# Altium PCB waffling60-MXHS.PcbDoc (part 3 of 3)
Units mm, origin at the board's own origin, x right, y up, seen from the top; angles counter-clockwise.
Board outline 284.81 x 94.3 mm, 2 copper layers (Component Side, Bottom Layer), stack 1.571 mm thick; 157 components, 101 nets, 956 pads, 124 vias.
Unrouted connection lines stored in the file: 1.
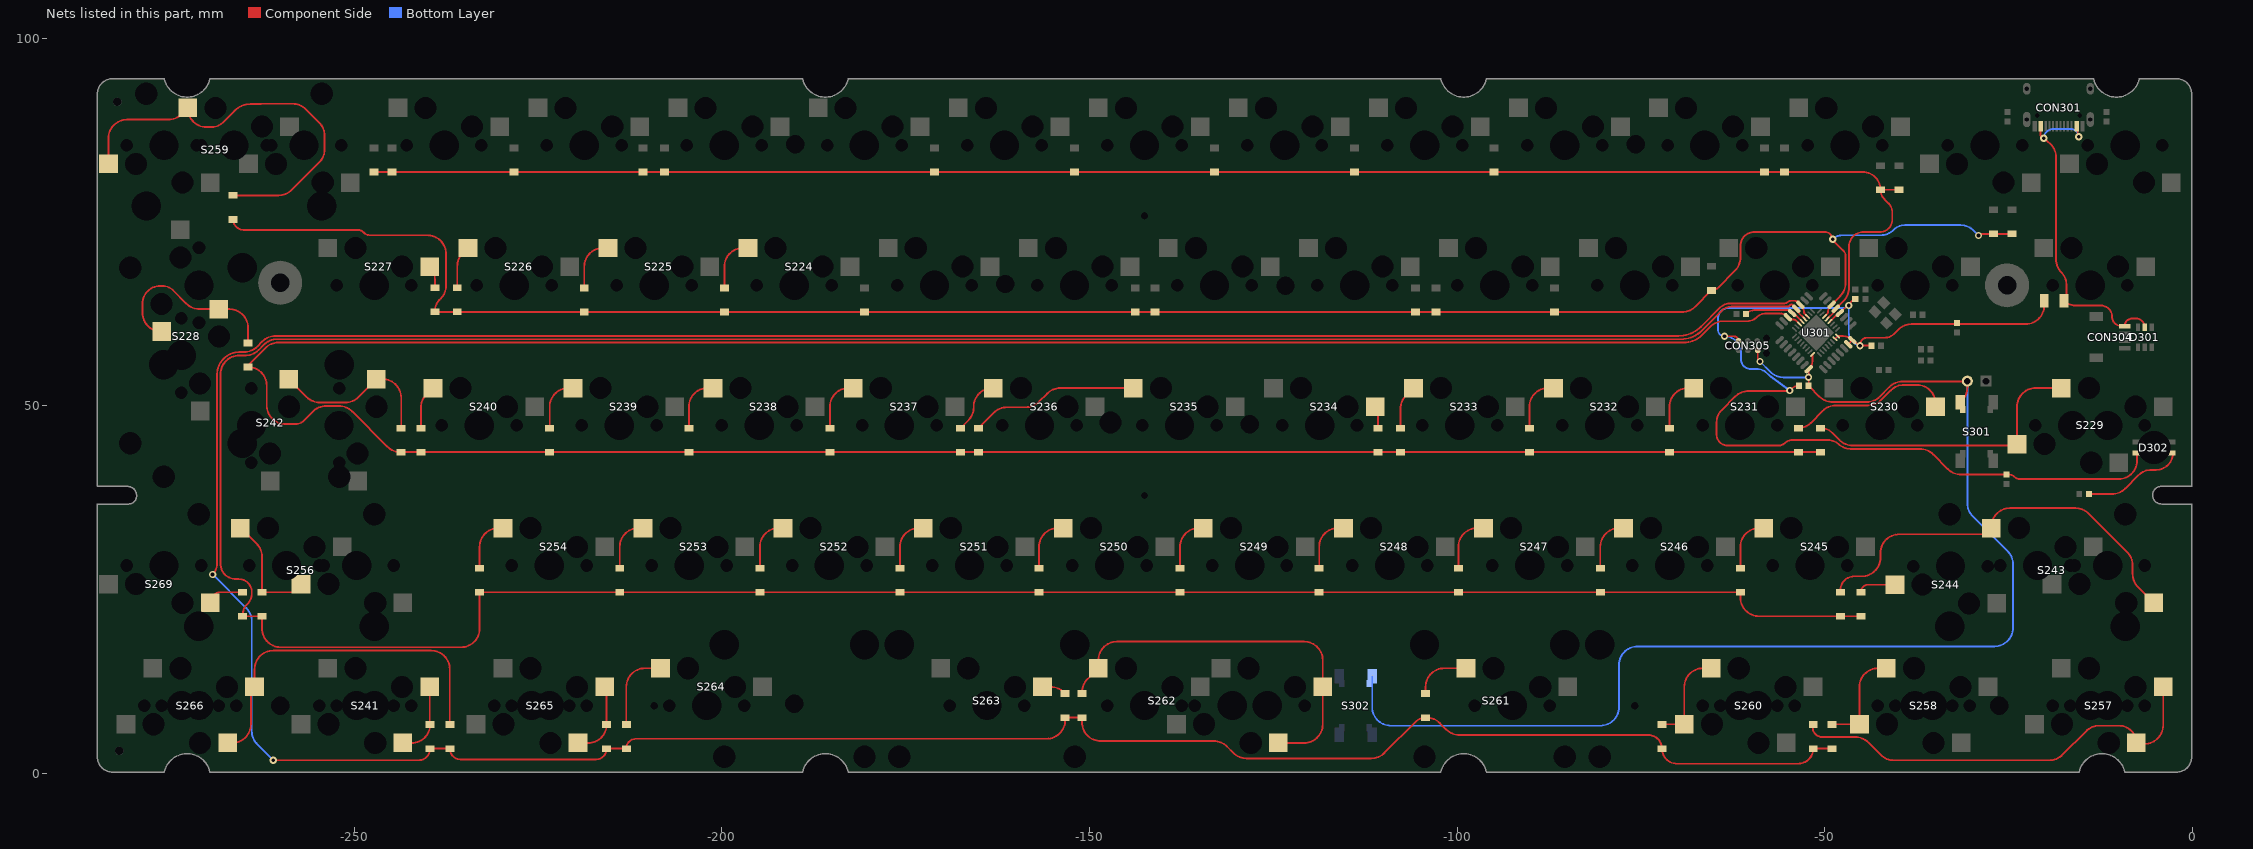
[diagram p3: the nets of this part, all layers, seen from the top]

## Via types
v1: diameter 1, hole 0.5, Component Side to Bottom Layer, tented both sides, 119 vias
v2: diameter 1, hole 0.5, Component Side to Bottom Layer, tented bottom, 5 vias

## Nets (pads, with @x,y where several pads share a name; then routed paths per layer and width w, separated by ;. In a path a pad name is that pad's centre, name@x,y a point inside that pad or via, vN(x,y) a via of type N, cw(c..) or ccw(c..) an arc to the next point about the centre after c; other vN are vias at no path point) (continued)
NetD224_1: D224.1 S224.1 | length 7.6
  Component Side w0.254: D224.1@-199.644,66 -199.644,68.905 cw(c-197.104,68.905) -197.104,71.445 S224.1@-196.415,71.445
NetD225_1: D225.1 S225.1 | length 7.6
  Component Side w0.254: D225.1@-218.694,66 -218.694,68.905 cw(c-216.154,68.905) -216.154,71.445 S225.1@-215.465,71.445
NetD226_1: D226.1 S226.1 | length 5.9
  Component Side w0.254: D226.1@-235.966,66.024 -235.966,68.942 cw(c-233.426,68.942) -235.222,70.738 S226.1@-234.515,71.445
NetD227_1: D227.1 S227.1 | length 3.1
  Component Side w0.254: S227.1@-239.715,68.905 cw(c-241.407,67.213) -239.014,67.213 D227.1@-239.014,66.024
NetD228_1: D228.1 S259.1 | length 57
  Component Side w0.254: S259.1@-283.41,82.875 -283.41,86.36 cw(c-280.87,86.36) -280.87,88.9 -275.262,88.9 ccw(c-275.262,91.44) -273.466,89.644 S259.1@-272.615,90.495 -272.615,90.424 ccw(c-270.075,90.424) -270.075,87.884 -269.333,87.884 ccw(c-269.333,89.93) -267.886,88.483 -266.242,90.127 cw(c-264.124,88.011) -264.124,91.005 -262.793,91.005 ccw(c-262.793,91.259) -262.636,91.059 -258.354,91.059 cw(c-258.354,88.519) -256.558,90.315 -254.744,88.501 cw(c-256.54,86.705) -254,86.705 -254,84.872 cw(c-256.54,84.872) -254.744,83.076 -258.479,79.341 cw(c-260.275,81.137) -260.275,78.597 D228.1@-266.446,78.597
NetD229_1: D229.1 S229.1 | length 40.1
  Component Side w0.254: D229.1@-50.546,46.95 cw(c-50.546,44.707) -48.961,46.294 ; -48.96,46.293 -47.988,45.321 ccw(c-46.192,47.117) -46.192,44.577 -24.052,44.577 ccw(c-24.052,44.775) S229.1@-23.854,44.775 -23.854,49.855 cw(c-21.314,49.855) -21.314,52.395 S229.1@-17.821,52.395
NetD230_1: D230.1 S230.1 | length 22.6
  Component Side w0.254: D230.1@-53.594,46.95 ccw(c-53.594,49.306) -51.928,47.64 -50.274,49.294 cw(c-48.478,47.498) -48.478,50.038 -44.105,50.038 ccw(c-44.105,52.578) -42.309,50.782 -41.003,52.088 cw(c-39.207,50.292) -39.207,52.832 -37.467,52.832 cw(c-37.467,50.292) -34.927,50.292 S230.1@-34.927,49.855
NetD231_1: D231.1 S231.1 | length 7.6
  Component Side w0.254: D231.1@-71.12,46.95 -71.12,49.855 cw(c-68.58,49.855) -68.58,52.395 S231.1@-67.827,52.395
NetD232_1: D232.1 S232.1 | length 7.6
  Component Side w0.254: D232.1@-90.17,46.95 -90.17,49.855 cw(c-87.63,49.855) -87.63,52.395 S232.1@-86.877,52.395
NetD233_1: D233.1 S233.1 | length 6.1
  Component Side w0.254: D233.1@-107.696,46.95 -107.696,49.574 cw(c-105.156,49.574) -106.952,51.37 S233.1@-105.927,52.395
NetD234_1: D234.1 S234.1 | length 3
  Component Side w0.254: S234.1@-111.127,49.855 cw(c-112.053,48.929) -110.744,48.929 D234.1@-110.744,46.95
NetD235_1: D235.1 S235.1 | length 22.5
  Component Side w0.254: D235.1@-165.1,46.95 -163.01,49.04 cw(c-161.214,47.244) -161.214,49.784 -158.659,49.784 ccw(c-158.659,52.324) -156.863,50.528 -155.74,51.651 cw(c-153.944,49.855) -153.944,52.395 S235.1@-144.481,52.395
NetD236_1: D236.1 S236.1 | length 7.6
  Component Side w0.254: D236.1@-167.513,46.95 -166.479,47.984 ccw(c-168.275,49.78) -165.735,49.78 -165.735,49.855 cw(c-163.195,49.855) -163.195,52.395 S236.1@-163.077,52.395
NetD237_1: D237.1 S237.1 | length 7.5
  Component Side w0.254: D237.1@-185.293,46.95 -185.293,49.855 cw(c-182.753,49.855) -182.753,52.395 S237.1@-182.127,52.395
NetD238_1: D238.1 S238.1 | length 7.6
  Component Side w0.254: D238.1@-204.47,46.95 -204.47,49.855 cw(c-201.93,49.855) -201.93,52.395 S238.1@-201.177,52.395
NetD239_1: D239.1 S239.1 | length 7.5
  Component Side w0.254: D239.1@-223.393,46.95 -223.393,49.855 cw(c-220.853,49.855) -220.853,52.395 S239.1@-220.227,52.395
NetD240_1: D240.1 S240.1 | length 6
  Component Side w0.254: D240.1@-240.919,46.95 -240.919,49.701 cw(c-238.379,49.701) -240.175,51.497 S240.1@-239.277,52.395
NetD241_1: D241.1 S242.1 | length 23.3
  Component Side w0.254: S242.1@-258.87,53.605 -256.428,51.163 ccw(c-254.632,52.959) -254.632,50.419 -251.202,50.419 ccw(c-251.202,52.959) -249.406,51.163 S242.1@-246.964,53.605 -246.126,53.605 cw(c-246.126,51.065) -243.586,51.065 D241.1@-243.586,46.95
NetD242_1: D242.1 S228.1 | length 25.7
  Component Side w0.254: S228.1@-276.167,60.075 -276.225,60.075 cw(c-276.225,62.615) -278.765,62.615 -278.765,63.881 cw(c-276.352,63.881) -276.352,66.294 -276.098,66.294 cw(c-276.098,64.148) -274.58,65.665 -272.789,63.874 ccw(c-270.993,65.67) -270.993,63.13 S228.1@-268.389,63.13 -266.954,63.13 cw(c-266.954,60.59) -266.207,63.018 cw(c-266.954,60.59) -264.526,61.337 cw(c-266.954,60.59) -264.414,60.59 D242.1@-264.414,58.531
NetD243_1: D243.1 S243.1 | length 56.5
  Component Side w0.254: D243.1@-47.879,24.635 -47.879,24.892 cw(c-45.974,24.892) -45.974,26.797 -44.958,26.797 ccw(c-44.958,29.337) -42.418,29.337 -42.418,29.972 cw(c-39.878,29.972) -39.878,32.512 -28.179,32.512 ccw(c-28.179,33.345) S243.1@-27.346,33.345 -27.346,33.528 cw(c-24.806,33.528) -24.806,36.068 -15.911,36.068 cw(c-15.911,33.528) -14.115,35.324 -8.872,30.081 cw(c-10.668,28.285) -8.128,28.285 -8.128,27.124 ccw(c-5.588,27.124) -7.384,25.328 S243.1@-5.241,23.185
NetD244_1: D244.1 S244.2 | length 5.2
  Component Side w0.254: D244.1@-45.085,24.635 cw(c-44.066,24.635) -44.066,25.654 S244.2@-40.453,25.654
NetD245_1: D245.1 S245.1 | length 7.5
  Component Side w0.254: D245.1@-61.468,27.9 -61.468,30.805 cw(c-58.928,30.805) -58.928,33.345 S245.1@-58.302,33.345
NetD246_1: D246.1 S246.1 | length 7.5
  Component Side w0.254: D246.1@-80.518,27.9 -80.518,30.805 cw(c-77.978,30.805) -77.978,33.345 S246.1@-77.352,33.345
NetD247_1: D247.1 S247.1 | length 7.8
  Component Side w0.254: D247.1@-99.822,27.9 -99.822,30.805 cw(c-97.282,30.805) -97.282,33.345 S247.1@-96.402,33.345
NetD248_1: D248.1 S248.1 | length 7.6
  Component Side w0.254: D248.1@-118.745,27.9 -118.745,30.805 cw(c-116.205,30.805) -116.205,33.345 S248.1@-115.452,33.345
NetD249_1: D249.1 S249.1 | length 7.5
  Component Side w0.254: D249.1@-137.668,27.9 -137.668,30.805 cw(c-135.128,30.805) -135.128,33.345 S249.1@-134.502,33.345
NetD250_1: D250.1 S250.1 | length 7.6
  Component Side w0.254: D250.1@-156.845,27.9 -156.845,30.805 cw(c-154.305,30.805) -154.305,33.345 S250.1@-153.552,33.345
NetD251_1: D251.1 S251.1 | length 7.5
  Component Side w0.254: D251.1@-175.768,27.9 -175.768,30.805 cw(c-173.228,30.805) -173.228,33.345 S251.1@-172.602,33.345
NetD252_1: D252.1 S252.1 | length 7.5
  Component Side w0.254: D252.1@-194.818,27.9 -194.818,30.805 cw(c-192.278,30.805) -192.278,33.345 S252.1@-191.652,33.345
NetD253_1: D253.1 S253.1 | length 7.5
  Component Side w0.254: D253.1@-213.868,27.9 -213.868,30.805 cw(c-211.328,30.805) -211.328,33.345 S253.1@-210.702,33.345
NetD254_1: D254.1 S254.1 | length 7.5
  Component Side w0.254: D254.1@-232.918,27.9 -232.918,30.805 cw(c-230.378,30.805) -230.378,33.345 S254.1@-229.752,33.345
NetD255_1: D255.1 S256.1 | length 15.8
  Component Side w0.254: S256.1@-265.37,33.345 -263.253,31.228 cw(c-265.049,29.432) -262.509,29.432 D255.1@-262.509,24.635 -258.205,24.635 ccw(c-258.205,25.725) S256.1@-257.115,25.725
NetD256_1: D256.1 S269.1 | length 5.2
  Component Side w0.254: S269.1@-269.56,23.185 cw(c-268.11,23.185) -268.11,24.635 D256.1@-265.176,24.635
NetD257_1: D257.1 S257.2 | length 59.2
  Component Side w0.254: D257.1@-51.623,6.2 ccw(c-50.376,6.2) -50.376,4.953 -45.883,4.953 cw(c-45.883,2.413) -44.087,4.209 -42.4,2.522 ccw(c-40.604,4.318) -40.604,1.778 -19.467,1.778 ccw(c-19.467,4.318) -17.671,2.522 -14.46,5.733 cw(c-12.664,3.937) -12.664,6.477 -9.964,6.477 cw(c-9.964,4.135) S257.2@-7.622,4.135 ; S257.2@-7.622,4.011 -6.511,4.011 ccw(c-6.511,6.551) -3.971,6.551 S257.2@-3.971,11.755
NetD258_1: D258.1 S258.1 | length 13.9
  Component Side w0.254: D258.1@-49.022,6.635 cw(c-48.982,6.635) -48.982,6.675 S258.1@-45.284,6.675 -45.284,11.755 cw(c-42.744,11.755) -42.744,14.295 S258.1@-41.633,14.295
NetD259_1: D259.1 S260.1 | length 13.2
  Component Side w0.254: D259.1@-72.136,6.635 cw(c-72.096,6.635) -72.096,6.675 S260.1@-69.097,6.675 -69.097,11.755 cw(c-66.557,11.755) -66.557,14.295 S260.1@-65.446,14.295
NetD260_1: D260.1 S261.1 | length 7.8
  Component Side w0.254: D260.1@-104.267,10.85 -104.267,11.755 cw(c-101.727,11.755) -101.727,14.295 S261.1@-98.783,14.295
NetD261_1: D261.1 S262.2 | length 55.2
  Component Side w0.254: D261.1@-151.003,10.85 -151.003,11.029 cw(c-148.463,11.029) -150.259,12.825 S262.2@-148.789,14.295 -148.789,15.367 cw(c-146.249,15.367) -146.249,17.907 -120.803,17.907 cw(c-120.803,15.367) -118.263,15.367 S262.2@-118.263,11.755 -118.263,6.675 cw(c-120.803,6.675) -120.803,4.135 S262.2@-124.613,4.135
NetD262_1: D262.1 S263.1 | length 3.3
  Component Side w0.254: S263.1@-156.371,11.755 -155.246,11.755 cw(c-155.246,9.215) -153.45,11.011 D262.1@-153.289,10.85
NetD263_1: D263.1 S264.1 | length 11.2
  Component Side w0.254: D263.1@-212.979,6.635 -212.979,11.755 cw(c-210.439,11.755) -210.439,14.295 S264.1@-208.321,14.295
NetD264_1: D264.1 S265.1 | length 10.6
  Component Side w0.254: S265.1@-219.553,4.135 -218.146,4.135 ccw(c-218.146,6.635) D264.1@-215.646,6.635 -215.646,11.499 ccw(c-215.902,11.499) S265.1@-215.902,11.755
NetD265_1: D265.1 S241.2 | length 10.3
  Component Side w0.254: S241.2@-243.366,4.135 -242.149,4.135 ccw(c-242.149,6.635) D265.1@-239.649,6.635 cw(c-239.491,6.793) -239.714,6.793 S241.2@-239.714,11.755
NetD266_1: D266.1 S266.1 | length 49.3
  Component Side w0.254: S266.1@-267.178,4.135 -266.573,4.135 ccw(c-266.573,6.675) -264.033,6.675 -264.033,11.249 cw(c-263.527,11.249) S266.1@-263.527,11.755 -263.527,14.151 cw(c-260.987,14.151) -260.987,16.691 -239.522,16.691 cw(c-239.522,14.151) -236.982,14.151 D266.1@-236.982,6.635
NetD302_4: D302.4 R307.1 | length 13.9
  Component Side w0.254: R307.1@-14.082,37.973 -10.958,37.973 ccw(c-10.958,40.513) -9.162,38.717 -7.348,40.531 cw(c-5.552,38.735) -5.552,41.275 -4.93,41.275 ccw(c-4.93,43.561) D302.4@-2.644,43.561
NetR302_1: R302.1 U301.13 | length 8.4
  Component Side w0.254: R302.1@-60.691,62.484 cw(c-59.419,61.212) -59.419,63.011 -55.261,63.011 cw(c-55.261,61.781) -54.392,62.651 -54.271,62.651 U301.13@-53.058,61.438
RAW: CON301.A4B9 CON301.B4A9 CON304.1 D301.5 F301.2 | length 46.6
  Component Side w0.254: CON301.B4A9@-20.65,88 -20.65,86.817 ccw(c-20.193,86.817) v1(-20.193,86.36) -19.286,85.58 cw(c-21.082,83.784) -18.542,83.784 -18.542,69.886 ccw(c-16.002,69.886) -17.798,68.09 cw(c-19.375,66.513) -17.145,66.513 -17.145,64.989 cw(c-18.173,64.989) F301.2@-17.446,64.262 ccw(c-15.913,65.795) -15.913,63.627 -12.446,63.627 cw(c-12.446,62.103) -10.922,62.103 ccw(c-9.634,62.103) -9.634,60.815 CON304.1@-9.206,60.815 cw(c-8.172,60.815) -8.172,61.849 -7.642,61.849 cw(c-7.642,60.684) D301.5@-6.477,60.684 ; CON301.A4B9@-15.75,88 v1(-15.46,86.575)
  Bottom Layer w0.254: v1(-20.193,86.36) cw(c-18.923,86.36) -18.923,87.63 -16.515,87.63 cw(c-16.515,86.575) v1(-15.46,86.575)
row1: D201.2 D202.2 D203.2 D204.2 D205.2 D206.2 D207.2 D208.2 D209.2 D210.2 D211.2 D212.2 D213.2 D214.2 U301.5 | length 232.3
  Component Side w0.254: D214.2@-247.269,81.78 D213.2@-244.856,81.78 D212.2@-228.219,81.78 D211.2@-210.693,81.78 D210.2@-207.772,81.78 D209.2@-171.069,81.78 D208.2@-152.019,81.78 D207.2@-132.969,81.78 D206.2@-113.919,81.78 D205.2@-94.996,81.78 D204.2@-58.166,81.78 D203.2@-55.499,81.78 -44.833,81.78 cw(c-44.833,79.365) D201.2@-42.418,79.365 ; U301.5@-49.664,61.792 -48.647,62.809 ccw(c-49.009,63.171) U301.5@-48.497,63.171 -47.449,64.219 ccw(c-49.245,66.015) -46.705,66.015 -46.705,71.629 cw(c-44.704,71.629) -46.598,72.274 cw(c-44.704,71.629) -45.349,73.523 cw(c-44.704,71.629) -44.704,73.63 -42.497,73.63 ccw(c-42.497,75.316) -42.026,73.697 ccw(c-42.497,75.316) -40.878,74.845 ccw(c-42.497,75.316) -40.811,75.316 -40.811,76.322 ccw(c-42.497,76.322) -40.878,76.793 ccw(c-42.497,76.322) -41.268,77.476 -41.896,78.104 cw(c-40.635,79.365) D201.2@-42.418,79.365 ; D202.2@-39.878,79.365 D201.2@-42.418,79.365
row2: D215.2 D216.2 D217.2 D218.2 D219.2 D220.2 D221.2 D222.2 D223.2 D224.2 D225.2 D226.2 D227.2 D228.2 U301.6 | length 274.1
  Component Side w0.254: D228.2@-266.446,75.327 ccw(c-265.033,75.327) -265.033,73.914 -249.586,73.914 cw(c-249.586,72.613) -248.666,73.533 ccw(c-247.804,74.395) -247.804,73.176 -240.03,73.176 cw(c-240.03,70.636) -239.615,73.142 cw(c-240.03,70.636) -237.524,71.051 cw(c-240.03,70.636) -237.49,70.636 -237.49,66.33 cw(c-240.03,66.33) -238.234,64.534 -238.379,64.389 ccw(c-236.846,62.856) -238.38,64.388 ccw(c-236.846,62.856) -239.014,62.856 D227.2@-239.014,62.754 D226.2@-235.966,62.754 ; D226.2@-235.966,62.73 D225.2@-218.694,62.73 D224.2@-199.644,62.73 D223.2@-180.594,62.73 D222.2@-143.764,62.73 D221.2@-141.097,62.73 D220.2@-105.664,62.73 D219.2@-102.87,62.73 D218.2@-86.741,62.73 -69.402,62.73 ccw(c-69.402,65.27) -68.577,62.868 ccw(c-69.402,65.27) -67.606,63.474 D217.2@-65.405,65.675 ccw(c-65.405,66.94) -64.51,66.046 -62.207,68.349 ccw(c-64.003,70.145) -61.463,70.145 -61.463,71.73 cw(c-59.563,71.73) -59.563,73.63 -50.001,73.63 cw(c-50.001,72.584) -48.955,72.584 -47.463,71.092 cw(c-48.197,70.358) -47.159,70.358 -47.159,66.692 cw(c-49.699,66.692) -47.903,64.896 U301.6@-49.063,63.736 -49.244,63.555 ccw(c-48.554,62.865) -49.53,62.865 cw(c-50.09,62.865) -49.694,62.469 U301.6@-50.018,62.145 ; v1(-29.083,73.152) -28.87,73.365 D216.2@-27.051,73.365 D215.2@-24.511,73.365
  Bottom Layer w0.254: v1(-48.895,72.644) cw(c-47.611,71.36) -48.423,72.984 cw(c-47.611,71.36) -47.611,73.176 -42.422,73.176 ccw(c-42.422,75.696) -40.64,73.914 cw(c-39.107,72.381) -39.107,74.549 -31.532,74.549 cw(c-31.532,72.009) -29.852,73.914 cw(c-31.532,72.009) -29.736,73.805 v1(-29.083,73.152)
row3: D229.2 D230.2 D231.2 D232.2 D233.2 D234.2 D235.2 D236.2 D237.2 D238.2 D239.2 D240.2 D241.2 D242.2 U301.14 | length 436.8
  Component Side w0.254: U301.14@-53.412,61.085 -53.888,61.561 ccw(c-54.229,61.221) -54.229,61.702 cw(c-54.229,62.757) -54.975,62.011 ccw(c-56.292,60.694) -54.977,62.013 ccw(c-56.292,60.694) -56.292,62.557 -57.912,62.557 ccw(c-57.912,60.587) -59.305,61.98 cw(c-60.495,63.17) -60.495,61.487 -63.762,61.487 ccw(c-63.762,58.947) -65.401,60.887 -66.695,59.593 cw(c-69.133,62.031) -69.133,58.583 -260.283,58.583 ccw(c-260.283,56.043) -262.079,57.84 -264.414,55.504 D242.2@-264.414,55.261 cw(c-264.414,52.721) -261.874,52.721 -261.874,50.038 ccw(c-259.334,50.038) -261.808,49.464 ccw(c-259.334,50.038) -259.908,47.564 ccw(c-259.334,50.038) -259.334,47.498 -257.937,47.498 ccw(c-257.937,49.031) -256.853,47.947 -255.579,49.221 cw(c-253.783,47.425) -255.305,49.459 cw(c-253.783,47.425) -253.783,49.965 -252.058,49.965 cw(c-252.058,47.425) -250.262,49.221 -245.465,44.424 ccw(c-243.669,46.22) -243.669,43.68 D241.2@-243.586,43.68 D240.2@-240.919,43.68 D239.2@-223.393,43.68 D238.2@-204.47,43.68 D237.2@-185.293,43.68 D236.2@-167.513,43.68 D235.2@-165.1,43.68 D234.2@-110.744,43.68 D233.2@-107.696,43.68 D232.2@-90.17,43.68 D231.2@-71.12,43.68 D230.2@-53.594,43.68 D229.2@-50.546,43.68
row4: D243.2 D244.2 D245.2 D246.2 D247.2 D248.2 D249.2 D250.2 D251.2 D252.2 D253.2 D254.2 D255.2 D256.2 U301.12 | length 487.8
  Component Side w0.254: -265.625,56.819 -264.793,56.819 ccw(c-264.793,59.359) -264.656,56.823 ccw(c-264.793,59.359) -262.997,57.563 -262.267,58.294 cw(c-260.471,56.497) -260.471,59.037 -69.509,59.037 ccw(c-69.509,62.939) -66.751,60.179 ccw(c-69.509,62.939) -66.75,60.18 -64.008,62.922 ; -265.625,56.823 ccw(c-265.625,54.283) -268.165,54.283 -268.165,28.516 ccw(c-266.065,28.516) -266.065,26.416 -265.684,26.416 cw(c-265.684,24.638) -263.906,24.638 -263.906,24.52 cw(c-266.074,24.52) -264.541,22.987 ccw(c-263.008,21.454) -265.176,21.454 D256.2@-265.176,21.365 D255.2@-262.509,21.365 -262.509,19.685 ccw(c-259.969,19.685) -259.969,17.145 -235.458,17.145 ccw(c-235.458,19.685) -232.918,19.685 D254.2@-232.918,24.63 D253.2@-213.868,24.63 D252.2@-194.818,24.63 D251.2@-175.768,24.63 D250.2@-156.845,24.63 D249.2@-137.668,24.63 D248.2@-118.745,24.63 D247.2@-99.822,24.63 D246.2@-80.518,24.63 D245.2@-61.468,24.63 -61.468,23.905 ccw(c-58.928,23.905) -58.928,21.365 D243.2@-47.879,21.365 D244.2@-45.085,21.365 ; -64.007,62.923 cw(c-62.698,61.612) -62.698,63.465 -55.128,63.465 ccw(c-55.128,64.018) -54.737,63.627 -54.7,63.664 cw(c-54.483,63.447) -54.483,63.754 cw(c-54.483,63.685) -54.435,63.734 U301.12@-53.871,63.171 ccw(c-53.359,63.171) -53.721,62.809 U301.12@-52.705,61.792
row5: D257.2 D258.2 D259.2 D260.2 D261.2 D262.2 D263.2 D264.2 D265.2 D266.2 U301.11 | length 503.6
  Component Side w0.254: v1(-269.24,27.051) ccw(c-270.739,28.55) -268.619,28.55 -268.619,54.283 cw(c-265.625,54.283) -265.625,57.277 ; -265.625,57.286 -264.969,57.286 ccw(c-264.969,59.826) -263.173,58.03 -262.455,58.748 cw(c-260.659,56.951) -260.659,59.491 -69.885,59.491 ccw(c-69.885,63.847) -66.805,60.767 -64.187,63.386 cw(c-62.72,61.634) -62.72,63.919 -55.435,63.919 ccw(c-55.435,64.445) -55.063,64.073 cw(c-54.607,63.617) -54.607,64.262 -54.102,64.262 cw(c-54.102,63.608) U301.11@-53.64,64.071 ; v1(-260.985,1.778) -241.236,1.778 ccw(c-241.236,3.365) D265.2@-239.649,3.365 D266.2@-236.982,3.365 ccw(c-235.522,3.365) -235.522,1.905 -217.106,1.905 ccw(c-217.106,3.365) D264.2@-215.646,3.365 D263.2@-212.979,3.365 cw(c-211.645,3.365) -211.645,4.699 -155.829,4.699 ccw(c-155.829,7.239) -153.899,5.588 ccw(c-155.829,7.239) -153.289,7.239 D262.2@-153.289,7.58 D261.2@-151.003,7.58 -151.003,6.934 ccw(c-148.463,6.934) -150.617,5.588 ccw(c-148.463,6.934) -148.463,4.394 -133.081,4.394 cw(c-133.081,1.854) -131.285,3.65 -130.411,2.776 ccw(c-128.615,4.572) -128.615,2.032 -111.669,2.032 ccw(c-111.669,4.572) -109.873,2.776 -105.636,7.013 cw(c-104.267,5.644) D260.2@-104.267,7.58 -104.136,7.58 cw(c-104.136,5.04) -102.34,6.836 -101.455,5.951 ccw(c-99.659,7.747) -99.659,5.207 -73.978,5.207 cw(c-73.978,3.365) D259.2@-72.136,3.365 ccw(c-70.081,3.365) -70.081,1.31 -53.617,1.31 ccw(c-53.617,3.365) -53.096,1.377 ccw(c-53.617,3.365) -51.629,2.844 ccw(c-53.617,3.365) D257.2@-51.562,3.365 D258.2@-49.022,3.365 ; U301.11@-53.64,64.071 U301.11@-53.306,63.736 -53.203,63.634 cw(c-54.099,62.738) -52.832,62.738 ccw(c-52.562,62.738) -52.753,62.547 U301.11@-52.351,62.145
  Bottom Layer w0.254: v1(-269.24,27.051) -264.65,22.461 cw(c-266.446,20.665) -263.906,20.665 -263.906,5.751 ccw(c-261.366,5.751) -263.162,3.955 v1(-260.985,1.778)
RST: CON303.2 CON305.5 R301.2 S301.2 S302.2 U301.24 | length 178.5
  Component Side w0.254: v1@-59.102,56.214 CON305.5@-59.102,57.531 ; R301.2@-52.182,52.705 R301.2@-52.092,52.615 ; U301.24@-51.644,56.983 -51.644,56.249 cw(c-53.455,56.249) U301.24@-52.174,54.968 -52.174,53.848 -52.174,53.129 ccw(c-50.518,53.129) R301.2@-52.092,52.615 ; S301.2@-31.587,50.457 -31.351,50.693 ccw(c-33.147,52.489) -30.607,52.489 CON303.2@-30.607,53.34 cw(c-30.702,53.435) -30.702,53.3 -39.393,53.3 ccw(c-39.393,50.76) -41.189,52.557 -42.51,51.236 cw(c-44.306,53.032) -44.306,50.492 -48.917,50.492 cw(c-48.917,53.032) -49.188,50.506 cw(c-48.917,53.032) -50.713,51.236 R301.2@-52.092,52.615
  Bottom Layer w0.254: S302.2@-111.542,13.19 -111.542,12.215 -111.542,9.017 ccw(c-109.002,9.017) -109.002,6.477 -80.518,6.477 ccw(c-80.518,9.017) -77.978,9.017 -77.978,14.732 cw(c-75.438,14.732) -75.438,17.272 -26.924,17.272 ccw(c-26.924,19.812) -24.384,19.812 -24.384,28.412 ccw(c-26.924,28.412) -25.128,30.208 -29.863,34.943 cw(c-28.067,36.739) -30.607,36.739 CON303.2@-30.607,53.34 ; v1(-58.801,56.007) -57.386,54.592 ccw(c-55.59,56.388) -55.59,53.848 v1(-52.197,53.848)
VCC: C302.2 C303.2 C304.2 C307.2 CON305.2 D302.1 F301.1 R301.1 U301.4 U301.31 U301.32 | length 160
  Component Side w0.254: v1(-63.627,59.436) -62.357,59.436 cw(c-62.357,58.801) CON305.2@-61.722,58.801 ; R301.1@-53.482,52.705 ccw(c-53.482,51.208) -54.54,52.267 v1(-54.737,52.07) -54.81,51.997 -60.362,51.997 ccw(c-60.362,49.457) -62.158,51.253 -64.008,49.403 ccw(c-62.345,47.74) -64.697,47.74 -64.697,46.035 ccw(c-63.25,46.035) -63.25,44.588 -56.196,44.588 ccw(c-56.196,45.655) -55.441,44.9 cw(c-54.382,43.841) -54.382,45.339 -49.637,45.339 cw(c-49.637,42.95) -47.948,44.639 ccw(c-46.476,46.481) -46.476,44.123 -37.047,44.123 cw(c-37.047,41.583) -35.251,43.379 -33.241,41.369 ccw(c-31.445,43.165) -31.445,40.625 -24.834,40.625 cw(c-24.834,39.809) -24.257,40.386 ccw(c-23.337,41.306) -23.337,40.005 -10.061,40.005 ccw(c-10.061,42.545) -7.521,42.545 D302.1@-7.521,43.561 ; U301.4@-49.31,61.438 -48.294,62.455 cw(c-47.932,62.093) U301.4@-47.932,62.605 C302.2@-45.847,64.69 ; U301.31@-48.603,59.105 U301.32@-48.25,59.458 -47.515,59.458 cw(c-47.515,57.648) U301.32@-46.235,58.928 ; U301.31@-46.8,58.362 U301.32@-46.235,58.928 ; v1@-44.898,58.166 C303.2@-43.65,58.166 ; F301.1@-20.146,64.262 -20.146,63.627 cw(c-22.686,63.627) -22.686,61.087 -38.184,61.087 ccw(c-38.184,58.547) -39.98,60.343 -40.6,59.723 cw(c-41.898,61.209) -41.898,59.236 -44.363,59.236 ccw(c-44.363,58.544) -44.853,59.033 ccw(c-43.986,58.166) -45.206,58.29 cw(c-44.42,60.706) -46.216,58.91 U301.32@-46.235,58.928
  Bottom Layer w0.254: -57.389,53.995 ccw(c-55.59,56.388) -57.348,53.965 ; v1(-54.737,52.07) -57.348,53.965 ; v1(-45.212,58.166) -44.958,58.166 cw(c-44.958,59.944) -46.736,59.944 v1(-46.736,63.627) cw(c-47.525,64.416) -47.525,63.3 -58.203,63.3 ccw(c-58.203,60.76) -58.424,63.29 -63.075,63.29 ccw(c-63.075,61.849) -64.516,61.849 -64.516,60.325 ccw(c-63.627,60.325) v1(-63.627,59.436) cw(c-63.627,57.196) -61.387,57.196 -61.387,56.307 ccw(c-60.061,56.307) -60.061,54.981 -59.043,54.981 cw(c-59.24,53.028) -57.852,54.416 -57.707,54.271 ccw(c-55.59,56.388) -57.348,53.965
pads on no net: CON301. CON301.A8 CON301.B8 CON305.0 D301.1 D301.6 D302. D302.2 S201. S202. S203. S204. S205. S206. S207. S208. S209. S210. S211. S212. S213. S214. S215. S216. S217. S218. S219. S220. S221. S222. S223. S224. S225. S226. S227. S228. S229. S230. S231. S232. S233. S234. S235. S236. S237. S238. S239. S240. S241. S242. S243. S244. S245. S246. S247. S248. S249. S250. S251. S252. S253. S254. S256. S257. S258. S259. S260. S261. S262. S263. S264. S265. S266. S269. S301. S302.
copper on no net:
  other v1: -18.542,90.17

## Polygon pours and split planes (outlines as drawn)
GND on Component Side "Component Side-No Net" (hatched 45Degree grid 0.508 track 0.203, remove dead copper, pour order 1): -64.235,61.722 ccw(c-62.602,61.722) -63.757,60.567 -56.976,53.786 ccw(c-54.737,56.025) -54.737,52.859 -29.083,52.859 ccw(c-29.083,56.025) -26.844,53.786 -24.576,56.054 cw(c-22.479,53.957) -22.479,56.923 -16.572,56.923 cw(c-16.572,54.421) -14.803,56.191 cw(c-16.572,54.421) -14.803,56.19 ccw(c-13.506,57.487) -13.506,55.653 -7.112,55.653 ccw(c-7.112,58.819) -4.873,56.58 -3.739,57.714 ccw(c-3.81,57.785) -3.71,57.785 ccw(c-3.81,57.785) -3.722,57.833 ccw(c-3.674,57.921) -3.603,57.85 -1.97,59.483 ccw(c-4.209,61.722) -1.043,61.722 -1.043,74.041 ccw(c-4.209,74.041) -1.97,76.28 -2.841,77.151 ccw(c-5.08,74.912) -5.08,78.078 -13.843,78.078 cw(c-13.843,79.248) -15.013,79.248 -15.013,84.963 cw(c-13.97,84.963) -13.97,86.006 ccw(c-13.97,86.868) -13.108,86.868 -13.108,92.837 ccw(c-14.478,92.837) -14.478,94.207 -22.098,94.207 ccw(c-22.098,94.107) -22.143,94.196 ccw(c-21.971,92.837) -23.33,93.009 ccw(c-23.241,92.964) -23.341,92.964 -23.341,87.376 ccw(c-21.971,87.376) -21.971,86.006 -21.844,86.006 cw(c-21.844,84.836) -20.674,84.836 -20.674,78.232 ccw(c-17.508,78.232) -19.747,75.993 -18.876,75.122 ccw(c-16.637,77.361) -16.637,74.195 -6.35,74.195 cw(c-6.35,73.025) -5.18,73.025 -5.18,64.262 cw(c-6.35,64.262) -6.35,63.092 -13.4,63.092 ccw(c-13.4,60.39) -15.311,62.301 cw(c-17.08,64.07) -15.311,62.3 cw(c-17.08,64.07) -17.08,61.568 -33.147,61.568 cw(c-33.147,64.534) -35.244,62.437 -38.909,66.102 ccw(c-41.148,63.863) -41.148,67.029 -45.085,67.029 ccw(c-45.085,63.863) -47.324,66.102 -49.211,64.215 cw(c-51.308,66.312) -51.308,63.346 -62.865,63.346 ccw(c-62.865,61.976) -64.235,61.976
GND on Bottom Layer "Bottom Layer-GND" (hatched 45Degree grid 0.508 track 0.203, remove dead copper, pour order 2): -64.235,61.722 ccw(c-62.602,61.722) -63.757,60.567 -56.976,53.786 ccw(c-54.737,56.025) -54.737,52.859 -29.083,52.859 ccw(c-29.083,56.025) -26.844,53.786 -24.576,56.054 cw(c-22.479,53.957) -22.479,56.923 -16.572,56.923 cw(c-16.572,54.421) -14.803,56.191 cw(c-16.572,54.421) -14.803,56.19 ccw(c-13.506,57.487) -13.506,55.653 -7.112,55.653 ccw(c-7.112,58.819) -4.873,56.58 -3.739,57.714 ccw(c-3.81,57.785) -3.71,57.785 ccw(c-3.81,57.785) -3.722,57.833 ccw(c-3.674,57.921) -3.603,57.85 -1.97,59.483 ccw(c-4.209,61.722) -1.043,61.722 -1.043,74.041 ccw(c-4.209,74.041) -1.97,76.28 -2.841,77.151 ccw(c-5.08,74.912) -5.08,78.078 -13.843,78.078 cw(c-13.843,79.248) -15.013,79.248 -15.013,84.963 cw(c-13.97,84.963) -13.97,86.006 ccw(c-13.97,86.868) -13.108,86.868 -13.108,92.837 ccw(c-14.478,92.837) -14.478,94.207 -22.098,94.207 ccw(c-22.098,94.107) -22.143,94.196 ccw(c-21.971,92.837) -23.33,93.009 ccw(c-23.241,92.964) -23.341,92.964 -23.341,87.376 ccw(c-21.971,87.376) -21.971,86.006 -21.844,86.006 cw(c-21.844,84.836) -20.674,84.836 -20.674,78.232 ccw(c-17.508,78.232) -19.747,75.993 -18.876,75.122 ccw(c-16.637,77.361) -16.637,74.195 -6.35,74.195 cw(c-6.35,73.025) -5.18,73.025 -5.18,64.262 cw(c-6.35,64.262) -6.35,63.092 -13.4,63.092 ccw(c-13.4,60.39) -15.311,62.301 cw(c-17.08,64.07) -15.311,62.3 cw(c-17.08,64.07) -17.08,61.568 -33.147,61.568 cw(c-33.147,64.534) -35.244,62.437 -38.909,66.102 ccw(c-41.148,63.863) -41.148,67.029 -45.085,67.029 ccw(c-45.085,63.863) -47.324,66.102 -49.211,64.215 cw(c-51.308,66.312) -51.308,63.346 -62.865,63.346 ccw(c-62.865,61.976) -64.235,61.976

## Other copper
Component Side:
  pour cut-out: -276.236,94.342 ccw(c-272.7,95.149) -269.153,94.388 ccw(c-269.278,94.415) -269.15,94.415 ccw(c-269.278,94.415) -269.278,94.542 -276.067,94.542 ccw(c-276.067,94.415) -276.177,94.48 ccw(c-276.112,94.37)
  pour cut-out: -189.436,94.342 ccw(c-185.9,95.149) -182.353,94.388 ccw(c-182.478,94.415) -182.35,94.415 ccw(c-182.478,94.415) -182.478,94.542 -189.267,94.542 ccw(c-189.267,94.415) -189.377,94.48 ccw(c-189.312,94.37)
  pour cut-out: -102.636,94.342 ccw(c-99.1,95.149) -95.553,94.388 ccw(c-95.678,94.415) -95.55,94.415 ccw(c-95.678,94.415) -95.678,94.542 -102.467,94.542 ccw(c-102.467,94.415) -102.577,94.48 ccw(c-102.512,94.37)
  pour cut-out: -13.836,94.342 ccw(c-10.3,95.149) -6.753,94.388 ccw(c-6.878,94.415) -6.75,94.415 ccw(c-6.878,94.415) -6.878,94.542 -13.667,94.542 ccw(c-13.667,94.415) -13.777,94.48 ccw(c-13.712,94.37)
  pour cut-out: -8.764,0.288 ccw(c-12.3,-0.519) -15.847,0.242 ccw(c-15.722,0.215) -15.85,0.215 ccw(c-15.722,0.215) -15.722,0.088 -8.933,0.088 ccw(c-8.933,0.215) -8.823,0.15 ccw(c-8.888,0.26)
  pour cut-out: -95.564,0.288 ccw(c-99.1,-0.519) -102.647,0.242 ccw(c-102.522,0.215) -102.65,0.215 ccw(c-102.522,0.215) -102.522,0.088 -95.733,0.088 ccw(c-95.733,0.215) -95.623,0.15 ccw(c-95.688,0.26)
  pour cut-out: -269.164,0.288 ccw(c-272.7,-0.519) -276.247,0.242 ccw(c-276.122,0.215) -276.25,0.215 ccw(c-276.122,0.215) -276.122,0.088 -269.333,0.088 ccw(c-269.333,0.215) -269.223,0.15 ccw(c-269.288,0.26)
  pour cut-out: -182.364,0.288 ccw(c-185.9,-0.519) -189.447,0.242 ccw(c-189.322,0.215) -189.45,0.215 ccw(c-189.322,0.215) -189.322,0.088 -182.533,0.088 ccw(c-182.533,0.215) -182.423,0.15 ccw(c-182.488,0.26)
  pour cut-out: -280.49,-2.44 ccw(c-280.49,-0.94) -280.49,0.561 cw(c-280.49,4.06) -283.99,4.06 ccw(c-285.49,4.06) -285.49,5.561 ccw(c-285.49,4.06) -286.991,4.06 ccw(c-280.49,4.06)
  pour cut-out: -287.043,90.504 ccw(c-285.543,90.504) -284.043,90.504 cw(c-280.543,90.504) -280.543,94.004 ccw(c-280.543,95.504) -279.043,95.504 ccw(c-280.543,95.504) -280.543,97.004 ccw(c-280.543,90.504)
  pour cut-out: 2.44,4.117 ccw(c0.94,4.117) -0.561,4.117 cw(c-4.06,4.117) -4.06,0.617 ccw(c-4.06,-0.883) -5.561,-0.883 ccw(c-4.06,-0.883) -4.06,-2.384 ccw(c-4.06,4.117)
  pour cut-out: -4.117,97.055 ccw(c-4.117,95.555) -4.117,94.054 cw(c-4.117,90.555) -0.617,90.555 ccw(c0.883,90.555) 0.883,89.054 ccw(c0.883,90.555) 2.384,90.555 ccw(c-4.117,90.555)
Bottom Layer:
  pour cut-out: -8.764,0.288 ccw(c-12.3,-0.519) -15.847,0.242 ccw(c-15.722,0.215) -15.85,0.215 ccw(c-15.722,0.215) -15.722,0.088 -8.933,0.088 ccw(c-8.933,0.215) -8.823,0.15 ccw(c-8.888,0.26)
  pour cut-out: -13.836,94.342 ccw(c-10.3,95.149) -6.753,94.388 ccw(c-6.878,94.415) -6.75,94.415 ccw(c-6.878,94.415) -6.878,94.542 -13.667,94.542 ccw(c-13.667,94.415) -13.777,94.48 ccw(c-13.712,94.37)
  pour cut-out: -102.636,94.342 ccw(c-99.1,95.149) -95.553,94.388 ccw(c-95.678,94.415) -95.55,94.415 ccw(c-95.678,94.415) -95.678,94.542 -102.467,94.542 ccw(c-102.467,94.415) -102.577,94.48 ccw(c-102.512,94.37)
  pour cut-out: -95.564,0.288 ccw(c-99.1,-0.519) -102.647,0.242 ccw(c-102.522,0.215) -102.65,0.215 ccw(c-102.522,0.215) -102.522,0.088 -95.733,0.088 ccw(c-95.733,0.215) -95.623,0.15 ccw(c-95.688,0.26)
  pour cut-out: -182.364,0.288 ccw(c-185.9,-0.519) -189.447,0.242 ccw(c-189.322,0.215) -189.45,0.215 ccw(c-189.322,0.215) -189.322,0.088 -182.533,0.088 ccw(c-182.533,0.215) -182.423,0.15 ccw(c-182.488,0.26)
  pour cut-out: -189.436,94.342 ccw(c-185.9,95.149) -182.353,94.388 ccw(c-182.478,94.415) -182.35,94.415 ccw(c-182.478,94.415) -182.478,94.542 -189.267,94.542 ccw(c-189.267,94.415) -189.377,94.48 ccw(c-189.312,94.37)
  pour cut-out: -276.236,94.342 ccw(c-272.7,95.149) -269.153,94.388 ccw(c-269.278,94.415) -269.15,94.415 ccw(c-269.278,94.415) -269.278,94.542 -276.067,94.542 ccw(c-276.067,94.415) -276.177,94.48 ccw(c-276.112,94.37)
  pour cut-out: -269.164,0.288 ccw(c-272.7,-0.519) -276.247,0.242 ccw(c-276.122,0.215) -276.25,0.215 ccw(c-276.122,0.215) -276.122,0.088 -269.333,0.088 ccw(c-269.333,0.215) -269.223,0.15 ccw(c-269.288,0.26)
  pour cut-out: -280.49,-2.44 ccw(c-280.49,-0.94) -280.49,0.561 cw(c-280.49,4.06) -283.99,4.06 ccw(c-285.49,4.06) -285.49,5.561 ccw(c-285.49,4.06) -286.991,4.06 ccw(c-280.49,4.06)
  pour cut-out: -4.117,97.055 ccw(c-4.117,95.555) -4.117,94.054 cw(c-4.117,90.555) -0.617,90.555 ccw(c0.883,90.555) 0.883,89.054 ccw(c0.883,90.555) 2.384,90.555 ccw(c-4.117,90.555)
  pour cut-out: 2.44,4.117 ccw(c0.94,4.117) -0.561,4.117 cw(c-4.06,4.117) -4.06,0.617 ccw(c-4.06,-0.883) -5.561,-0.883 ccw(c-4.06,-0.883) -4.06,-2.384 ccw(c-4.06,4.117)
  pour cut-out: -287.043,90.504 ccw(c-285.543,90.504) -284.043,90.504 cw(c-280.543,90.504) -280.543,94.004 ccw(c-280.543,95.504) -279.043,95.504 ccw(c-280.543,95.504) -280.543,97.004 ccw(c-280.543,90.504)

## Silkscreen, mask and mechanical layers (free items; w line width, h text height)
Top Overlay:
  lines w0.254: -147.193,16.802 -120.142,16.802 -120.142,23.114 -147.193,23.114 -147.193,16.802
  text "RST" at -34.163,52.959 h0.75
  text "GND" at -26.289,52.959 h0.75
  text "Waffling60HS" at -146.177,19.812 h4.5
  text "by 4pplet" at -129.794,17.78 h2
  text "Rev B1" at -146.05,17.653 h2
Bottom Overlay:
  lines w0.2: -31.877,52.07 -31.877,54.61 -26.797,54.61 -26.797,52.07 -31.877,52.07
  text "CON303" at -27.178,55.118 h0.75
  text "RST" at -29.845,50.8 h0.75
  text "GND" at -26.924,50.8 h0.75
  text "RESET" at -111.76,2.921 h0.75
outline:
  lines w0.1: -284.861,36.576 -280.67,36.576 ccw(c-280.67,37.719) -279.527,37.719 -279.527,37.795 ccw(c-280.797,37.795) -280.797,39.065 -284.85,39.065 -284.85,92.415 cw(c-282.85,92.415) -282.85,94.415 -275.85,94.415 ccw(c-272.7,95.149) -269.55,94.415 -189.05,94.415 ccw(c-185.9,95.149) -182.75,94.415 -102.25,94.415 ccw(c-99.1,95.149) -95.95,94.415 -23.553,94.415 ; -284.85,36.565 -284.85,2.215 ccw(c-282.85,2.215) -282.85,0.215 -275.85,0.215 cw(c-272.7,-0.52) -269.55,0.215 -189.05,0.215 cw(c-185.9,-0.52) -182.75,0.215 -102.25,0.215 cw(c-99.1,-0.52) -95.95,0.215 -15.45,0.215 cw(c-12.3,-0.52) -9.15,0.215 -2.15,0.215 ccw(c-2.15,2.215) -0.15,2.215 -0.15,36.576 -0.762,36.576 -4.191,36.576 cw(c-4.191,37.846) -5.461,37.846 cw(c-4.242,37.846) -4.242,39.065 -0.15,39.065 -0.15,92.415 ccw(c-2.15,92.415) -2.15,94.415 -7.15,94.415 ; -24.208,94.415 -13.477,94.415 ccw(c-10.327,95.149) -7.177,94.415
Mechanical 16:
  drawing of 624 lines, arcs and shapes, not listed

## Text inside footprints (layer, text, board x,y; h text height)
CON301: Mechanical 15 "connector edge" at -15.25,95.25 h1 r180
S262: Mechanical 16 "7U" at -208.331,7.365 h1.52 r270; Mechanical 16 "6.25U" at -188.764,5.615 h1.52 r270